# EAGLE board sequencer (EAGLE 7.2.0)
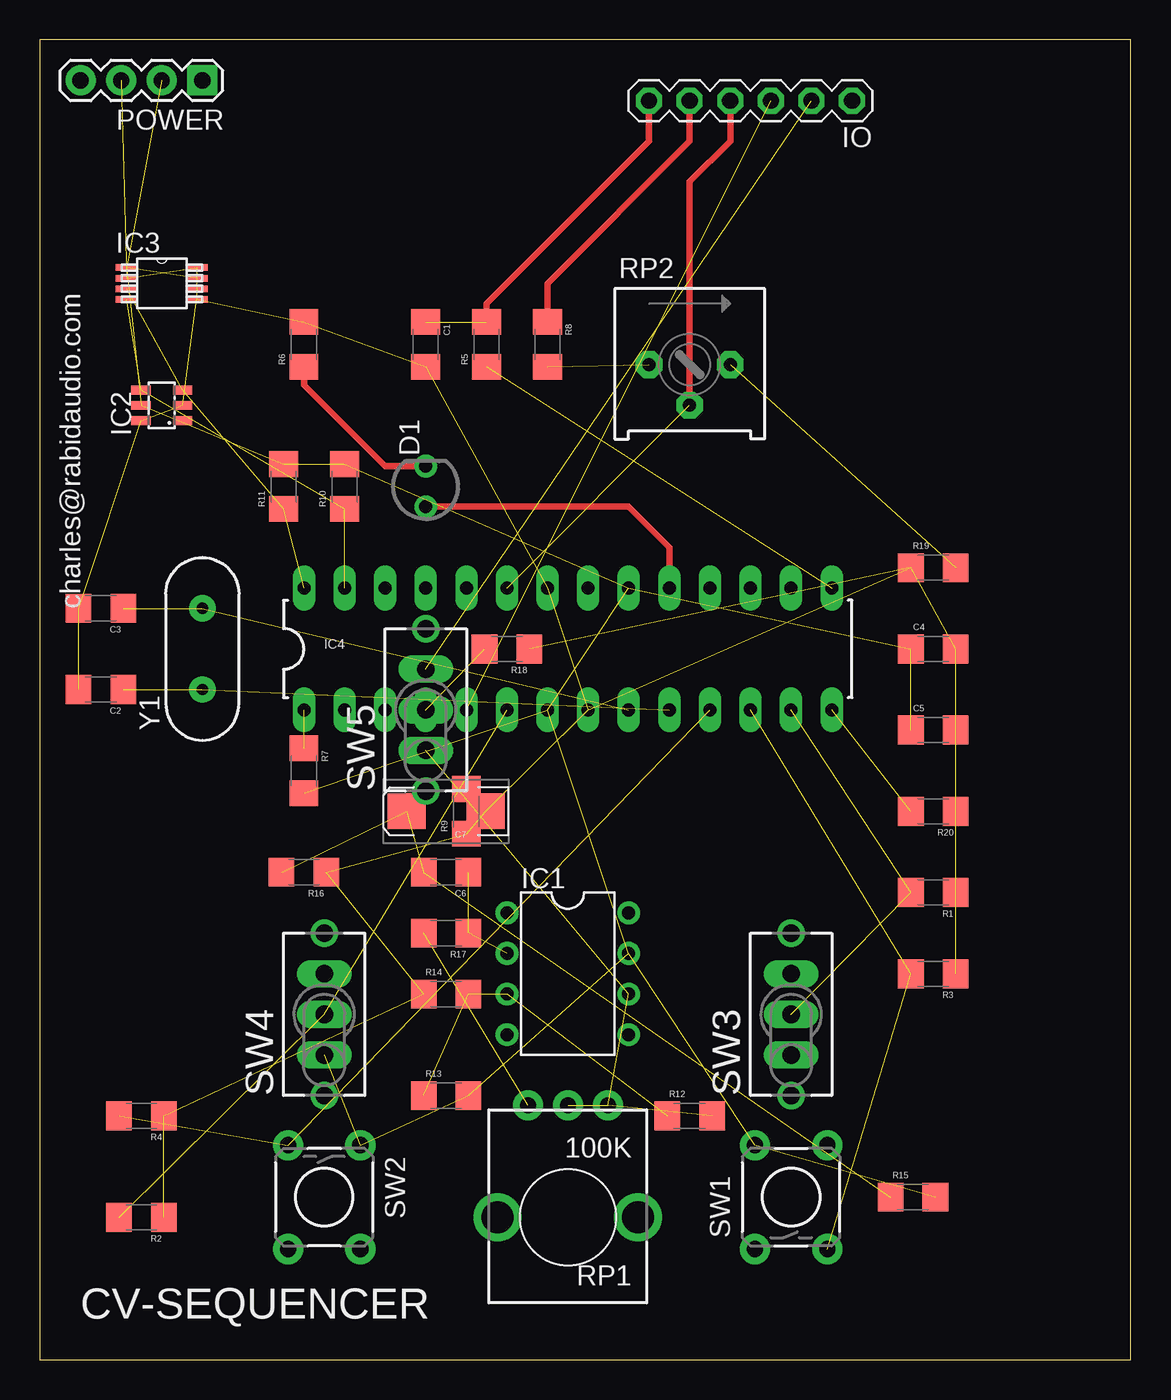
[diagram p0: board, top side]
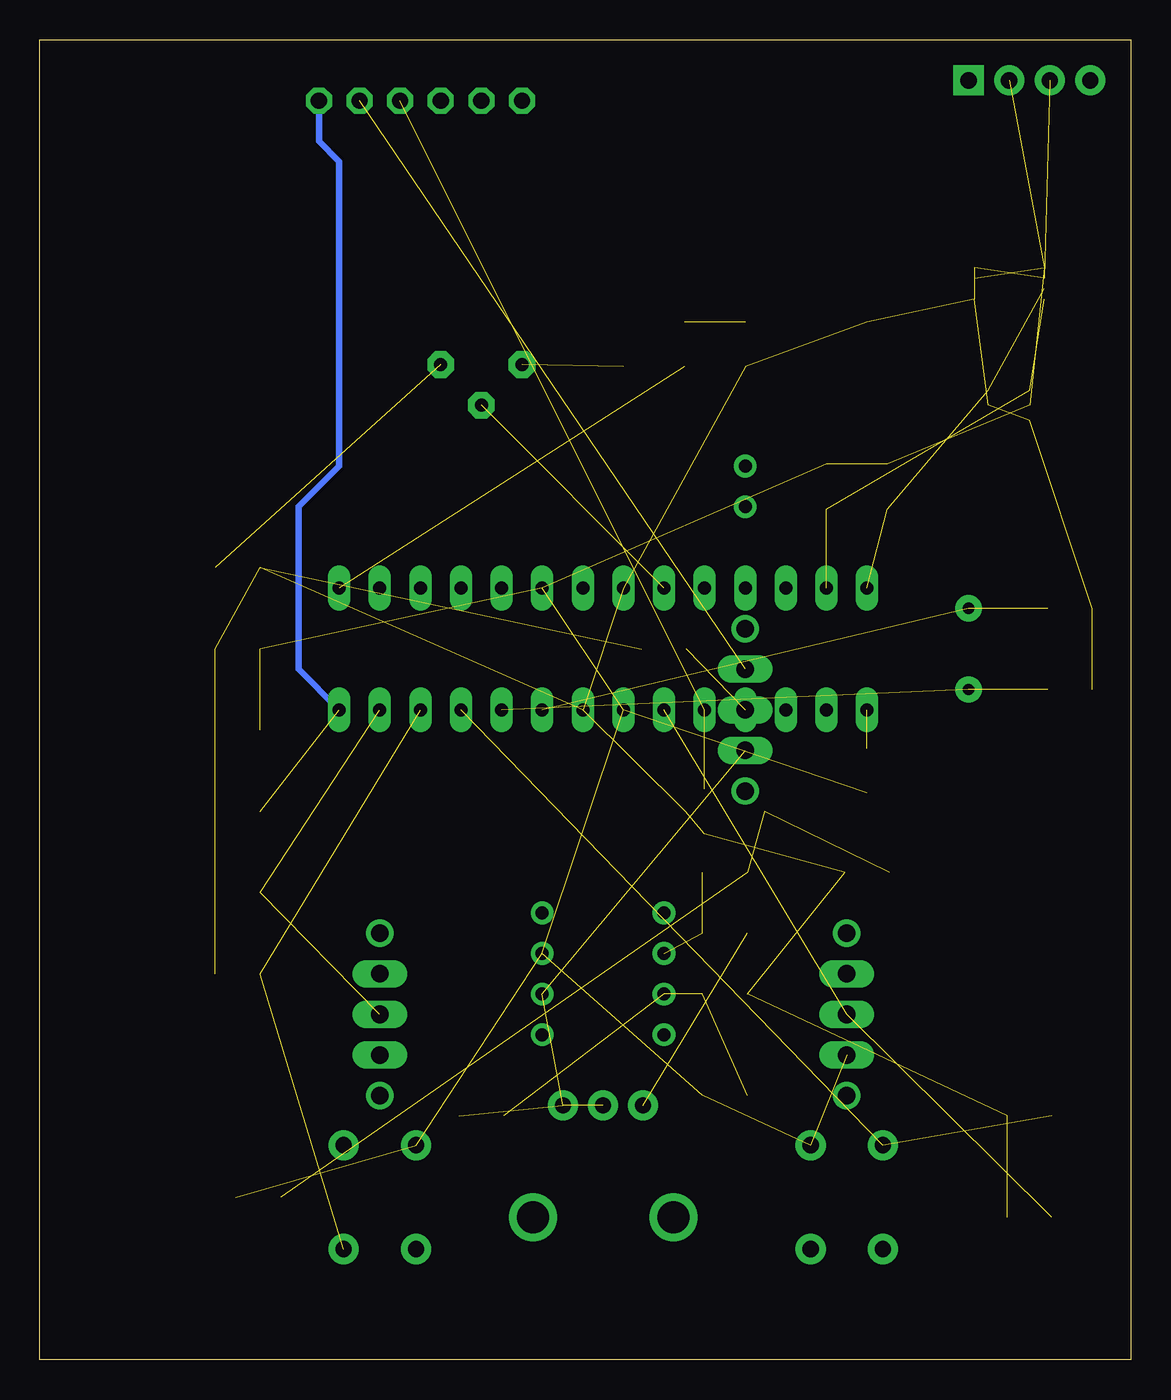
[diagram p1: board, bottom side, seen from below]

Size 68.25 x 82.54 mm. Coordinates in mm from the lower left corner, seen from the top.
Outline: 0,0 68.25,0 68.25,82.54 0,82.54 0,0
Copper layers (1*16): Top 0.035mm / dielectric 1.5mm / Bottom 0.035mm
Design rules "SparkFun": minimum track width 8mil, minimum drill 20mil, track to track 8mil, track to pad 8mil, pad to pad 8mil, via to via 8mil, smd to smd 8mil, copper to edge 8mil, drill to drill 8mil, minimum pad ring 12mil, minimum via ring 10mil, stop-mask expansion 4mil, vias tented up to drill 20mil, thermal gap 10mil

## Footprints (pad centres in the part's own frame; a part is rotated, then mirrored left to right if it is on the bottom)
1206 = smd 1.6 x 1.8: 1 -1.4,0; 2 1.4,0
EIA6032-NOM = smd 2.37 x 2.23: A 2.47,0; C -2.47,0
LED3MM-NS = drill 0.813: A -1.27,0; K 1.27,0
DIL08 = drill 0.813 pad 1.27: 1 -3.81,-3.81; 2 -1.27,-3.81; 3 1.27,-3.81; 4 3.81,-3.81; 5 3.81,3.81; 6 1.27,3.81; 7 -1.27,3.81; 8 -3.81,3.81
SOT-23-6 = smd 0.55 x 1.2: 1 -0.95,-1.3; 2 0,-1.3; 3 0.95,-1.3; 4 0.95,1.3; 5 0,1.3; 6 -0.95,1.3
21-0036K = smd 1.372 x 0.406: 1 -2.184,0.991; 2 -2.184,0.33; 3 -2.184,-0.33; 4 -2.184,-0.991; 5 2.184,-0.991; 6 2.184,-0.33; 7 2.184,0.33; 8 2.184,0.991
DIL28-3 = drill 0.813 long: 1 -16.51,-3.81; 2 -13.97,-3.81; 3 -11.43,-3.81; 4 -8.89,-3.81; 5 -6.35,-3.81; 6 -3.81,-3.81; 7 -1.27,-3.81; 8 1.27,-3.81; 9 3.81,-3.81; 10 6.35,-3.81; 11 8.89,-3.81; 12 11.43,-3.81; 13 13.97,-3.81; 14 16.51,-3.81; 15 16.51,3.81; 16 13.97,3.81; 17 11.43,3.81; 18 8.89,3.81; 19 6.35,3.81; 20 3.81,3.81; 21 1.27,3.81; 22 -1.27,3.81; 23 -3.81,3.81; 24 -6.35,3.81; 25 -8.89,3.81; 26 -11.43,3.81; 27 -13.97,3.81; 28 -16.51,3.81
06X1-PTH = drill 1.016 octagon: 1 -6.35,0; 2 -3.81,0; 3 -1.27,0; 4 1.27,0; 5 3.81,0; 6 6.35,0
1X04 = drill 1.016 pad 1.88 square: 1 0,0 | drill 1.016 pad 1.88: 2 2.54,0; 3 5.08,0; 4 7.62,0
ALPS_POT_KIT = drill 1 pad 1.88: P$1 7,-2.5; P$2 7,0; P$3 7,2.5 | drill 2: P$4 0,-4.4; P$5 0,4.4
3386P = drill 0.813 pad 1.676 octagon: 1 -2.54,0; 2 0,-2.54; 3 2.54,0
TACTILE-PTH = drill 1.016 pad 1.88: 1 -3.251,2.261; 2 3.251,2.261; 3 -3.251,-2.261; 4 3.251,-2.261
TL3XYO = drill 1.1 pad 1.422 long: 1 -2.54,0; 2 0,0; 3 2.54,0 | drill 1.1 pad 1.676: M1 -5.08,0; M2 5.08,0
HC49US = drill 0.7 pad 1.651: 1 -2.54,0; 2 2.54,0

## Placement (x,y rotation side)
C1  10n  [1206]  24.13,63.5 270 top
C2  22pF  [1206]  3.81,41.91 180 top
C3  22pF  [1206]  3.81,46.99 180 top
C4  .1u  [1206]  55.88,44.45 0 top
C5  .1u  [1206]  55.88,39.37 0 top
C6  1u  [1206]  25.4,30.48 180 top
C7  10UF-25V-10%(SMT-TANT)  [EIA6032-NOM]  25.4,34.29 180 top
D1  [LED3MM-NS]  24.13,54.61 90 top
IC1  LM741P  [DIL08]  33.02,24.13 270 top
IC2  [SOT-23-6]  7.62,59.69 90 top
IC3  MAX5217GUA+  [21-0036K]  7.62,67.31 0 top
IC4  ATMEGA328P_PDIP  [DIL28-3]  33.02,44.45 0 top
IO  HEADER-06X1-FEMALE  [06X1-PTH]  44.45,78.74 180 top
POWER  [1X04]  10.16,80.01 180 top
R1  10k  [1206]  55.88,29.21 180 top
R2  10k  [1206]  6.35,8.89 180 top
R3  10k  [1206]  55.88,24.13 180 top
R4  10k  [1206]  6.35,15.24 180 top
R5  100k  [1206]  27.94,63.5 90 top
R6  470  [1206]  16.51,63.5 90 top
R7  10k  [1206]  16.51,36.83 270 top
R8  47k  [1206]  31.75,63.5 270 top
R9  10k  [1206]  26.67,34.29 90 top
R10  10k  [1206]  19.05,54.61 90 top
R11  10k  [1206]  15.24,54.61 90 top
R12  100k  [1206]  40.64,15.24 0 top
R13  100k  [1206]  25.4,16.51 0 top
R14  100k  [1206]  25.4,22.86 0 top
R15  100k  [1206]  54.61,10.16 0 top
R16  100k  [1206]  16.51,30.48 180 top
R17  680  [1206]  25.4,26.67 180 top
R18  10k  [1206]  29.21,44.45 180 top
R19  2.2K  [1206]  55.88,49.53 0 top
R20  10k  [1206]  55.88,34.29 180 top
RP1  100K  [ALPS_POT_KIT]  33.02,8.89 90 top
RP2  10K  [3386P]  40.64,62.23 0 top
SW1  [TACTILE-PTH]  46.99,10.16 90 top
SW2  [TACTILE-PTH]  17.78,10.16 270 top
SW3  [TL3XYO]  46.99,21.59 90 top
SW4  [TL3XYO]  17.78,21.59 90 top
SW5  RATE_SRC  [TL3XYO]  24.13,40.64 90 top
Y1  16MHz  [HC49US]  10.16,44.45 90 top

## Library data of the parts
C1-C6 = SparkFun-Capacitors
C7 = SparkFun-Capacitors; PROD_ID: CAP-12984
D1 = SparkFun-LED
IC1 = linear
IC2 = ads11xx
IC3 = cjk; MANUFACTURER_PART_NUMBER: max5217gua+; VENDOR: MAXIM
IC4 = SparkFun-DigitalIC
IO = GeekAmmo
POWER = SparkFun-Connectors
R1-R20 = SparkFun-Passives
RP1 = SparkFun-Electromechanical; PROD_ID: RES-09177
RP2 = bourns
SW1 SW2 = SparkFun-Retired
SW3-SW5 = switch
Y1 = SparkFun-FreqCtrl

## Nets
CLEAR: IC4.12 R3.2 SW1.3
CV_OUT: C1.1 IO.6 R5.2
DIRECT_IN: IC4.23 IO.4 RP2.2
GND: C1.2 C2.2 C3.2 C4.2 C5.2 C7.C IC2.2 IC2.6 IC3.2 IC3.5 IC3.8 IC4.8 IC4.22 POWER.3 R1.1 R2.1 R3.1 R4.1 R6.2 R9.1 R14.1 R16.1 R18.1 R19.1 R20.1
KEYBOARD_CV_IN: IO.5 R8.1
N$1: IC4.15 R5.1
N$2: R19.2 RP2.3
N$3: D1.K R6.1
N$4: R8.2 RP2.1
N$5: IC4.1 R7.1
N$6: C3.1 IC4.9 Y1.2
N$7: C2.1 IC4.10 Y1.1
N$8: D1.A IC4.19
N$11: POWER.1
N$13: IC1.3 R12.1 R13.1 R14.2
N$14: POWER.4
N$15: R17.2 RP1.P$3
N$17: C6.2 C7.A R15.1 R16.2
N$18: C6.1 IC1.2 R17.1
PLAYBACKGATE: IC4.14 IO.1 R20.2
RATE: IC4.4 R18.2 SW5.2
RATE_EXTERNAL: IO.2 SW5.3
RATE_INTERNAL: IC1.6 R12.2 RP1.P$1 RP1.P$2 SW5.1
RECORD: IC4.11 R4.2 SW2.3
REVERSE: IC4.6 R2.2 SW4.2
SCL: IC2.3 IC3.3 IC4.28 R11.1
SDA: IC2.4 IC3.4 IC4.27 R10.1
SW3: SW3.1
TRIGGER: IC4.5 IO.3 R9.2
TRIGGERMODE: IC4.13 R1.2 SW3.2
V-: IC1.4
VCC: C4.1 C5.1 IC1.7 IC2.5 IC3.1 IC3.7 IC4.7 IC4.20 POWER.2 R7.2 R10.2 R11.2 R13.2 R15.2 SW1.2 SW2.1 SW4.1

## Tracks (layer width: path | path; a pad name or v marks a point on that pad's centre or on a via)
CLEAR  (2 unrouted)
CV_OUT  (1 unrouted)
  Top 0.406: IO.6 38.1,76.2 27.94,66.04 R5.2
DIRECT_IN  (1 unrouted)
  Top 0.406: RP2.2 40.64,73.66 43.18,76.2 IO.4
GND  (24 unrouted)
KEYBOARD_CV_IN
  Top 0.406: R8.1 31.75,67.31 40.64,76.2 IO.5
N$1  (1 unrouted)
N$2  (1 unrouted)
N$3
  Top 0.406: D1.K 21.59,55.88 16.51,60.96 R6.1
N$4  (1 unrouted)
N$5  (1 unrouted)
N$6  (2 unrouted)
N$7  (2 unrouted)
N$8
  Top 0.406: D1.A 36.83,53.34 39.37,50.8 IC4.19
N$13  (3 unrouted)
N$15  (1 unrouted)
N$17  (3 unrouted)
N$18  (2 unrouted)
PLAYBACKGATE  (1 unrouted)
  Bottom 0.406: IC4.14 52.07,43.18 52.07,53.34 49.53,55.88 49.53,74.93 50.8,76.2 IO.1
RATE  (2 unrouted)
RATE_EXTERNAL  (1 unrouted)
RATE_INTERNAL  (4 unrouted)
RECORD  (2 unrouted)
REVERSE  (2 unrouted)
SCL  (3 unrouted)
SDA  (3 unrouted)
TRIGGER  (2 unrouted)
TRIGGERMODE  (2 unrouted)
VCC  (16 unrouted)

## Text on the board
tPlace: charles@rabidaudio.com | CV-SEQUENCER